# Altium PCB SX1308_GTW_e381v02c.PcbDoc (part 3 of 3)
Units mil, origin at the board's own origin, x right, y up, seen from the top; angles counter-clockwise.
Board outline 2874.02 x 1220.47 mil, 4 copper layers (Top Layer, MidLayer1 - GND, MidLayer2 - Power, Bottom Layer), stack 62.441 mil thick; 180 components, 130 nets, 612 pads, 859 vias.
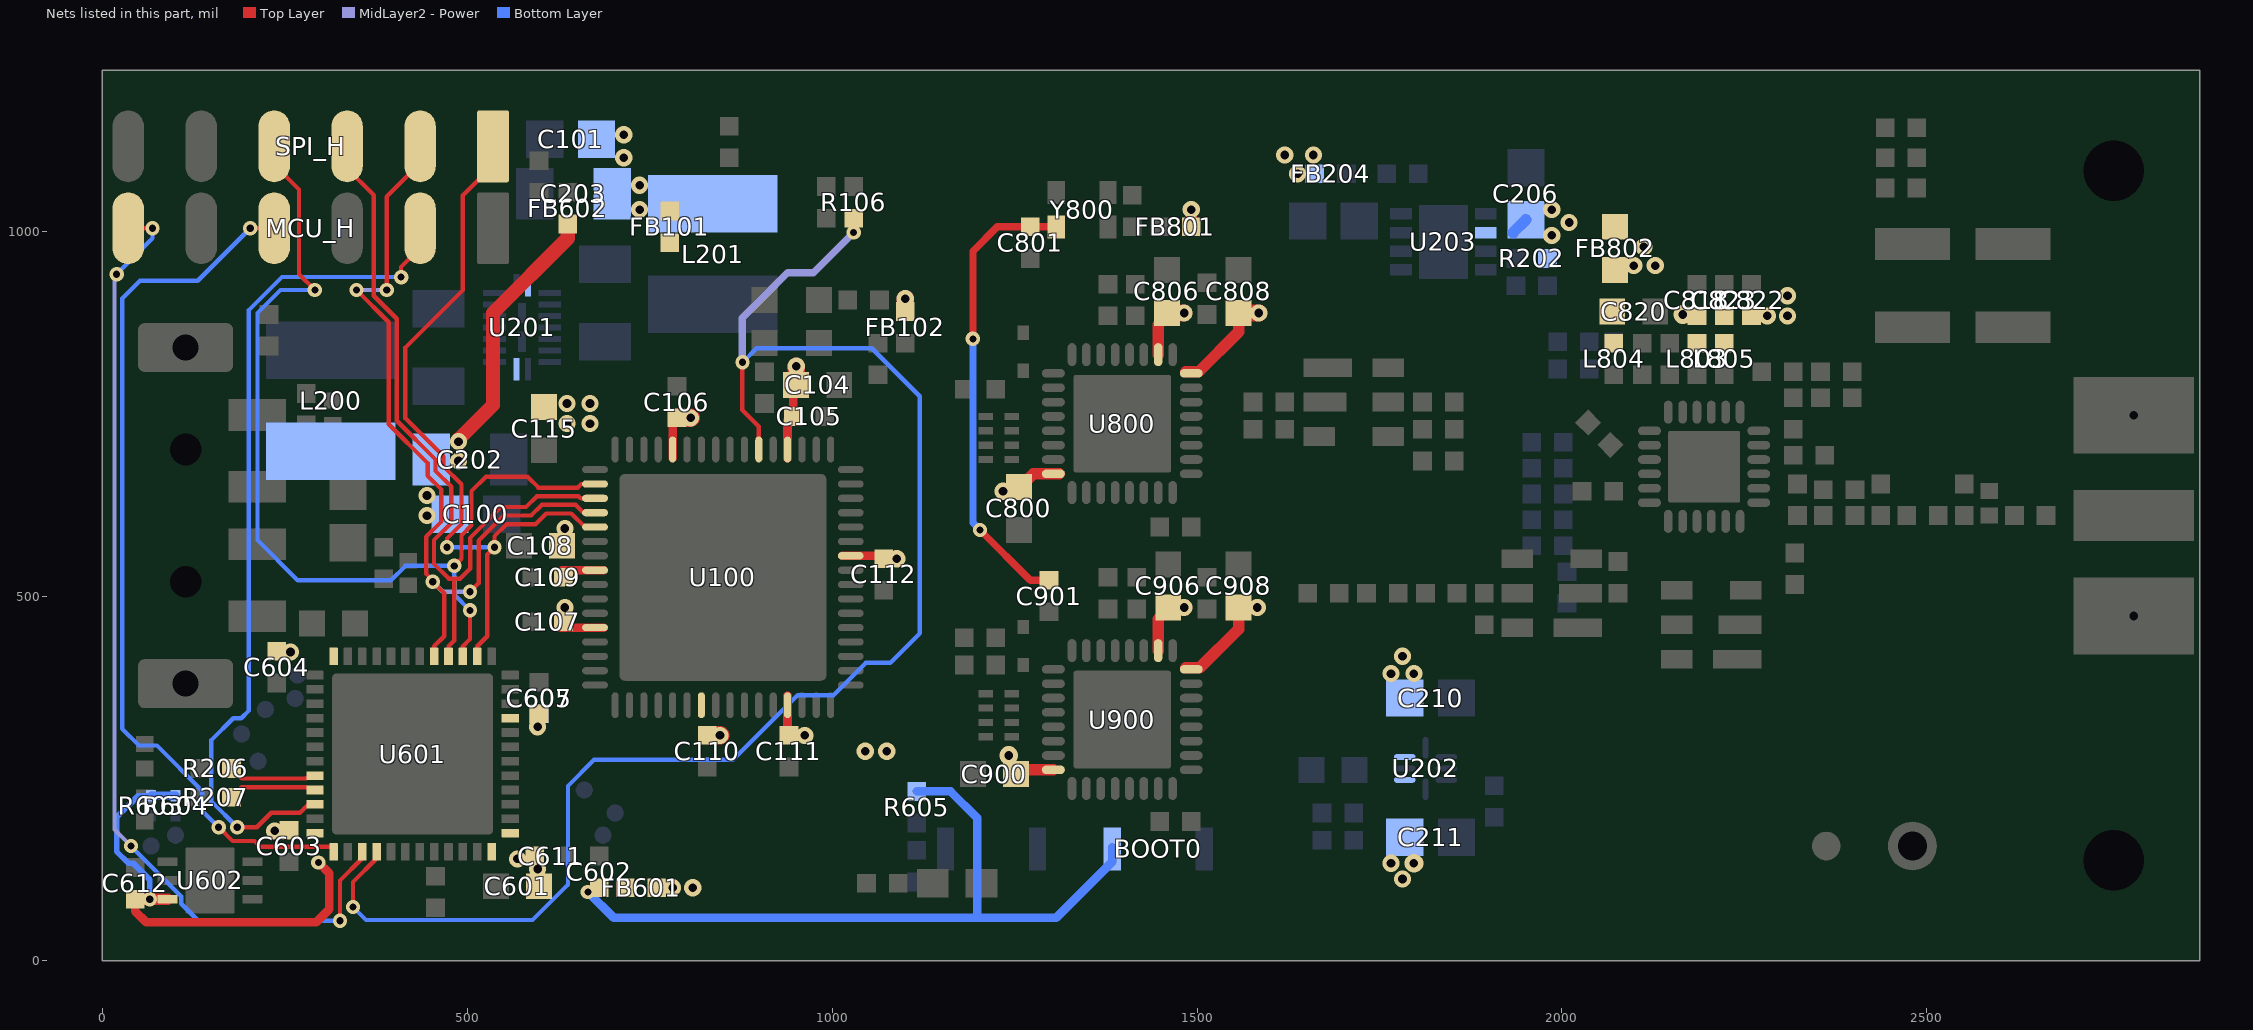
[diagram p5: the nets of this part, all layers, seen from the top]

## Via types
v1: diameter 23.62, hole 11.81, Top Layer to Bottom Layer, tented both sides, 584 vias
v2: diameter 19.68, hole 9.84, Top Layer to Bottom Layer, tented both sides, 166 vias
v3: diameter 23.62, hole 11.81, Top Layer to Bottom Layer, tented top, 89 vias
v4: diameter 19.68, hole 10, Top Layer to Bottom Layer, tented top, 16 vias
v5: diameter 25.59, hole 11.81, Top Layer to Bottom Layer, tented both sides, 3 vias
v6: diameter 18.9, hole 9.84, Top Layer to Bottom Layer, tented both sides, 1 vias

## Nets (pads, with @x,y where several pads share a name; then routed paths per layer and width w, separated by ;. In a path a pad name is that pad's centre, name@x,y a point inside that pad or via, vN(x,y) a via of type N, cw(c..) or ccw(c..) an arc to the next point about the centre after c; other vN are vias at no path point) (continued)
SPI_MISO: SPI_H.3 U100.3 U601.16 | length 1057.5
  Top Layer w5.91: SPI_H.3@334.65,1118.11 334.65,1086.61 371.97,1049.29 371.97,911.5 403.54,879.92 403.54,740.09 456.69,686.94 456.69,671.26 478.35,649.61 478.35,600.33 454.65,576.63 454.65,543.81 474.91,523.54 490.08,523.54 504.02,537.48 504.02,579.57 546.49,622.05 580.71,622.05 595.47,636.81 652.56,636.81 655.51,633.86 U100.3@674.21,633.86 ; U601.16@474.41,417.32 474.41,431.1 482.36,439.06 482.36,523.3 482.28,523.38 ; U100.3@672.24,635.83 U100.3@674.21,633.86 ; U100.3@675.2,633.86 U100.3@674.21,633.86
SPI_MOSI: SPI_H.2 U100.4 U601.17 | length 1147.9
  Top Layer w5.91: v2(348.43,919.29) 392.64,875.08 392.64,735.31 445.79,682.17 445.79,664.84 464.65,645.98 464.65,602.05 443.74,581.14 443.74,530.67 452.76,521.65 v2(452.76,519.68) 468.58,503.86 468.58,444.96 454.72,431.1 U601.17@454.72,417.32 ; v2(389.76,919.29) 389.76,1047.24 435.43,1092.91 SPI_H.2@435.43,1116.14 ; v2(503.94,505.91) 515.75,517.72 515.75,575.88 550.1,610.24 587.6,610.24 602.36,625 648.62,625 659.45,614.17 U100.4@675.2,614.17
  MidLayer2 - Power w5.91: v2(348.43,919.29) v2(389.76,919.29) ; v2(452.76,519.68) 466.54,505.91 v2(503.94,505.91)
SPI_NSS: SPI_H.1 U100.5 U601.14 | length 1010.3
  Top Layer w5.91: v2(472.44,566.93) 472.44,578.84 492.13,598.53 492.13,653.15 467.6,677.68 467.6,691.46 415.35,743.7 415.35,840.55 494.09,919.29 494.09,1049.21 SPI_H.1@531.5,1086.61 ; U601.14@513.78,417.32 513.78,431.1 527.48,444.8 527.48,557.01 v2(537.4,566.93) 537.4,582.11 553.71,598.43 593.5,598.43 608.27,613.19 642.72,613.19 661.42,594.49 673.62,594.49 674.41,595.28 U100.5@675.2,594.49 ; SPI_H.1@535.43,1116.14 SPI_H.1@535.43,1118.11
  MidLayer2 - Power w7.87: v2(537.4,566.93) v2@539.37,566.93
  Bottom Layer w5.91: v2(472.44,566.93) v2(537.4,566.93)
SPI_SCK: SPI_H.4 U100.2 U601.15 | length 1361.2
  Top Layer w5.91: SPI_H.4@236.22,1118.11 236.22,1090.55 269.69,1057.09 269.69,940.94 v2(291.34,919.29) ; v2(482.28,541.34) 492.13,551.18 492.13,583.11 505.91,596.89 505.91,643.7 525.67,663.46 582.6,663.46 597.52,648.54 651.5,648.54 656.5,653.54 657.48,653.54 U100.2@675.2,653.54 U100.2@675.98,654.33 ; U601.15@494.09,417.32 494.09,431.1 503.94,440.94 v2(503.94,480.31)
  Bottom Layer w5.91: v2(291.34,919.29) 244.09,919.29 212.6,887.8 212.6,576.77 267.72,521.65 395.67,521.65 415.35,541.34 v2(482.28,541.34) 482.36,541.26 482.36,501.89 v2(503.94,480.31)
SWCLK: MCU_H.4 U601.37 | length 1217
  Top Layer w5.91: v2(159.46,183.08) 159.89,183.07 178.59,164.37 208.66,164.37 216.46,156.57 316.85,156.57 316.93,156.5 U601.37@316.93,149.61 ; v2(202.76,1003.94) MCU_H.4@235.43,1003.94
  Bottom Layer w5.91: v2(159.46,183.08) 136.81,205.71 136.81,233.27 74.8,295.28 50.2,295.28 27.48,317.99 27.48,907.79 51.77,932.09 130.91,932.09 v2(202.76,1003.94)
SWDIO: MCU_H.2 U601.34 | length 1139.9
  Top Layer w5.91: v2(185.05,183.08) 211.62,183.08 231.61,203.07 270.91,203.07 282.4,214.57 U601.34@291.34,214.57 ; v2(409.45,937.01) 409.45,950.79 MCU_H.2@429.13,970.47 ; MCU_H.2@435.04,1003.94 MCU_H.2@435.43,1003.94
  Bottom Layer w5.91: v2(185.05,183.08) 149.53,218.58 149.53,302.65 179.48,332.6 190.44,332.6 200.87,343.02 200.87,891.81 246.14,937.09 409.37,937.09 v2(409.45,937.01)
TRACESWO: MCU_H.6 U601.39 | length 1352.9
  Top Layer w5.91: MCU_H.6@35.43,1003.94 v2(68.9,1003.94) ; v2(325.79,55.12) 325.73,55.18 325.73,110.1 356.3,140.67 U601.39@356.3,149.61
  MidLayer2 - Power w5.91: v2(19.68,940.94) 16.73,937.99 16.73,180.12 v2(39.37,157.49)
  Bottom Layer w5.91: v2(19.68,940.94) 68.9,990.16 v2(68.9,1003.94) ; v2(39.37,157.49) 39.37,157.09 108.19,88.27 108.19,78.43 131.5,55.12 v2(325.79,55.12)
TX_ON: R106.2 U100.54 U601.40 | length 2107.6
  Top Layer w5.91: v2(343.52,73.82) 343.52,108.21 375.98,140.67 U601.40@375.98,149.61 ; v2@876.97,819.88 876.97,754.92 899.61,732.28 U100.54@899.61,700.79
  MidLayer2 - Power w9.84: v2@876.97,819.88 876.97,880.91 938.98,942.91 974.41,942.91 v2(1029.53,998.03)
  Bottom Layer w5.91: v2(343.52,73.82) 361.3,56.02 589.49,56.02 638.03,104.57 638.03,239.8 673.82,275.59 864.17,275.59 952.76,364.17 1001.97,364.17 1046.18,408.39 1079.65,408.39 1120.08,448.82 1120.08,773.62 1054.21,839.49 896.57,839.49 v2@877.95,820.87
  other v2: 877.17,820.35
USB_DM: R206.2 U601.32 | length 121.5
  Top Layer w5.91: R206.2@177.17,263.78 190.94,250 279.53,250 283.46,253.94 U601.32@291.34,253.94
USB_DP: R207.2 U601.33 | length 121.5
  Top Layer w5.91: R207.2@177.17,224.41 190.94,238.19 279.53,238.19 283.46,234.25 U601.33@291.34,234.25
VCC33: BOOT0.2 C601.2 C602.2 C603.2 C604.2 C605.2 C607.2 C611.2 C612.2 FB601.2 R603.2 R604.2 R605.2 U601.1 U601.9 U601.24 U601.36 U601.48 U602.3 | length 1657.5
  Top Layer w11.81: C612.2@45.28,84.65 45.28,67.91 60.12,53.07 293.23,53.07 311.1,70.94 311.1,120 296.26,134.84 v2(296.18,134.84)
  Top Layer w15.75: C612.2@45.28,84.65 U602.3@89.57,84.65
  Bottom Layer w7.87: v2(64.96,84.65) 64.96,111.22 42.32,133.86 35.94,133.86 19.68,150.12 19.68,196.85 49.21,226.38 R603.2@66.93,226.38
  Bottom Layer w11.81: R603.2@66.93,226.38 R604.2@100.39,226.38 ; v2(665.35,94.49) 700.79,59.06 1198.82,59.06 ; R605.2@1116.14,232.28 1162.4,232.28 1198.9,195.79 1198.9,59.13 1198.82,59.06 ; BOOT0.2@1383.86,155.51 BOOT0.2@1383.86,153.54 1383.86,135.83 1307.09,59.06 1198.82,59.06
  other v1: 596.46,125.98 568.9,139.76 236.22,178.15 596.46,320.87 257.87,423.23
VCC_FEM: C820.2 C822.2 C823.2 FB802.2 L804.2 L805.2
  other v1: 2281.5,883.86 2309.06,883.86 2309.06,911.42 2098.43,952.76 2127.95,952.76 2112.2,978.35
VCC_FEM_1: C206.1 FB802.1 R202.1 U203.6 | length 25.1
  Bottom Layer w15.75: C206.1@1933.07,998.03 C206.1@1950.79,1015.75
  other v1: 1986.22,994.09 2009.84,1011.81 1986.22,1029.53
VCCA_A: C210.1 C800.2 C806.2 C808.2 C818.2 FB801.1 L803.2 U202.3 U800.2 U800.16 U800.32 | length 319.4
  Top Layer w15.75: C800.2@1255.91,653.54 1261.81,653.54 1275.59,667.32 U800.16@1303.15,667.32 U800.16@1311.02,667.32 ; U800.2@1446.85,830.71 1446.85,872.05 1458.66,883.86 C806.2@1458.66,887.8 ; U800.32@1484.25,807.09 1501.97,807.09 1557.09,862.2 C808.2@1557.09,887.8 ; FB801.1@1492.13,1005.91 v1(1492.13,1029.53)
  Top Layer w23.62: C806.2@1458.27,888.19 C806.2@1458.66,887.8 v1(1482.28,887.8) ; C808.2@1557.09,887.8 v1(1584.65,887.8)
  other v1: 1765.75,393.7 1797.24,393.7 1781.5,417.32 1234.25,643.7
  other v5: 2165.35,885.83
VCCA_B: C211.1 C900.2 C906.2 C908.2 U202.1 U900.2 U900.16 U900.32 | length 282.5
  Top Layer w15.75: C900.2@1257.87,261.81 U900.16@1303.15,261.81 ; U900.2@1446.85,425.2 1446.85,468.5 1460.63,482.28 C906.2@1460.63,484.25 ; U900.32@1484.25,401.57 1503.94,401.57 1557.09,454.72 C908.2@1557.09,484.25
  Top Layer w19.68: C908.2@1557.09,484.25 1580.71,484.25 v1@1582.68,486.22
  Top Layer w23.62: C906.2@1460.63,484.25 v1(1482.28,484.25)
  other v1: 1781.5,112.2 1765.75,133.86 1582.68,484.25
  other v5: 1797.24,133.86 1242.13,281.5
VCCDIG18: C106.2 C107.2 C108.2 C109.2 C110.2 C112.2 C115.1 FB101.2 U100.8 U100.12 U100.23 U100.42 U100.60 | length 280.7
  Top Layer w11.81: C107.2@625.98,456.69 U100.12@675.2,456.69 U100.12@687.01,456.69 ; C109.2@629.92,535.43 U100.8@675.2,535.43 U100.8@687.01,535.43 ; U100.60@781.5,688.98 U100.60@781.5,700.79 781.5,740.16 785.43,744.09 C106.2@787.4,744.09 ; C110.2@822.83,311.02 C110.2@822.83,314.96 ; U100.42@1013.78,555.12 U100.42@1025.59,555.12 C112.2@1064.96,555.12 ; C112.2@1068.9,555.12 C112.2@1064.96,555.12 ; C112.2@1070.87,549.21 C112.2@1064.96,555.12
  Top Layer w25.59: C106.2@787.4,744.09 v1(806.1,744.09) ; C110.2@828.74,309.06 v1(846.46,309.06)
  other v1: 633.86,484.25 1088.58,551.18 633.86,592.52 636.81,736.22 668.31,736.22 636.81,763.78 668.31,763.78
VCCDIG18_1: C101.2 C203.1 FB101.1 L201.2 U201.9
  other v1: 736.22,1029.53 736.22,1062.99 714.57,1100.39 714.57,1131.89
VCCDIG33: C100.2 C104.2 C105.2 C111.2 C202.1 FB102.1 FB204.1 FB601.1 FB602.2 L200.1 U100.29 U100.52 U201.18 | length 567.7
  Top Layer w11.81: C111.2@938.98,309.06 U100.29@938.98,350.39 U100.29@938.98,363.19 ; U100.52@938.98,688.98 U100.52@938.98,700.79 938.98,740.16 C105.2@946.85,748.03 ; C105.2@946.85,746.06 C105.2@946.85,748.03 ; C104.2@948.82,789.37 946.85,787.4 C104.2@946.85,785.43 ; C104.2@950.79,789.37 C104.2@946.85,785.43 ; C105.2@946.85,748.03 C104.2@946.85,785.43
  Top Layer w19.68: v1(488.19,711.61) 488.19,714.57 535.43,761.81 535.43,887.8 637.8,990.16 FB602.2@637.8,1009.84
  Top Layer w23.62: C104.2@950.79,791.34 v1(950.79,814.96) ; FB102.1@1100.39,889.76 v1(1100.39,907.48)
  other v1: 781.5,100.39 809.06,100.39 1045.28,287.4 1074.8,287.4 962.6,309.06 444.88,610.24 444.88,637.8 488.19,685.04 1637.8,1078.74 1620.08,1104.33 1659.45,1104.33
XTL_OUT: C801.1 C901.2 Y800.3 | length 637
  Top Layer w9.84: v2(1192.91,852.36) 1192.91,972.44 1226.38,1005.91 C801.1@1271.65,1005.91 Y800.3@1307.09,1005.91 ; v2(1202.76,590.55) 1271.65,521.65 C901.2@1297.24,521.65
  Bottom Layer w9.84: v2(1192.91,852.36) 1192.91,600.39 v2(1202.76,590.55)
pads on no net: "Fiducial Mark1.1" U100.13 U100.17 U100.18 U100.25 U100.26 U100.27 U100.28 U100.37 U100.38 U202.8 U203.1 U203.4 U203.5 U601.6 U601.11 U601.38 U602.5 U602.6 U800.6 U800.10 U800.21 U800.22 U800.23 U800.24 U802.19 U802.22 U900.6 U900.11 U900.21 U900.22 U900.23 U900.24 U900.29 U900.30 USB_DC_IN.NPTH1 USB_DC_IN.NPTH2

## Polygon pours and split planes (outlines as drawn)
GND on Bottom Layer "Bot GND" (solid, pour order 80): 2866.14,7.87 1606.3,7.87 1606.3,94.49 1891.73,94.49 1931.1,133.86 1931.1,419.29 1830.71,419.29 1830.71,437.01 1742.13,437.01 1742.13,307.09 1606.3,307.09 1606.3,7.87 11.81,7.87 11.81,228.35 217.52,228.35 217.52,86.61 628.94,86.61 628.94,287.4 887.8,287.4 1072.83,472.44 1161.42,472.44 1161.42,570.87 1251.97,480.32 1318.9,480.32 1326.77,488.19 1326.77,582.68 1281.5,582.68 1228.35,635.83 1228.35,872.05 931.1,872.05 931.1,1212.6 2866.14,1212.6
VCC33 on Bottom Layer "Bott Layer VCC33" (solid, pour order 61): 611.22,153.54 611.22,333.19 607.8,336.61 545.28,336.61 531.5,322.83 531.5,153.54
GND on Bottom Layer "Bot GND" (solid, pour order 77): 11.81,1212.6 547.24,1212.6 547.24,956.69 11.81,956.69 11.81,1129.64
GND on Bottom Layer "Bot GND" (solid, pour order 78): 937.01,1212.6 937.01,1084.65 870.08,1084.65 856.3,1098.43 856.3,1157.48 852.36,1161.42 102.36,1161.42 102.36,1212.6
GND on Bottom Layer "GND FEM" (solid, remove dead copper, pour order 76): 1596.46,1122.05 2037.4,1122.05 2037.4,887.8 1596.46,887.8
VCCDIG18 on Bottom Layer "VCC18" (solid, remove dead copper, pour order 74): 702.76,295.28 702.76,673.23 999.02,673.23 999.02,573.82 1037.4,535.43 1098.43,535.43 1100.39,537.4 1100.39,574.8 1088.58,586.61 1088.58,724.41 1035.43,777.56 627.95,777.56 617.13,766.73 617.13,687.99 622.05,683.07 622.05,336.61 663.39,295.28
VCCDIG18 on Bottom Layer "VCCDIG18 Bot" (solid, remove dead copper, pour order 75): 651.57,432.09 705.71,377.95 804.13,377.95 862.2,319.88 862.2,301.18 856.3,295.28 663.39,295.28 651.57,307.09
NetFB203_2 on Bottom Layer "Bott Layer FB302" (solid, pour order 59): 92.52,872.05 92.52,773.62 38.39,719.49 38.39,348.43 185.04,348.43 185.04,724.41 133.86,775.59 133.86,872.05
GND on Bottom Layer "32M GND Bot" (solid, remove dead copper, pour order 58): 1162.99,879.92 1162.99,577.17 1253.94,486.22 1314.96,486.22 1320.87,492.13 1320.87,568.9 1314.96,574.8 1279.53,574.8 1222.83,631.5 1222.83,879.92
VCCDIG33 on Bottom Layer "Midlayer GND" (solid, pour order 57): 767.72,92.52 775.59,84.65 954.72,84.65 1088.58,218.5 1088.58,293.31 1078.74,303.15 1043.31,303.15 1007.87,267.72 1007.87,253.94 907.48,153.54 789.37,153.54 767.72,131.89
VCC33 on Bottom Layer "Bott Layer VCC33" (solid, pour order 60): 557.09,112.2 557.09,120.08 551.18,125.98 263.78,125.98 224.41,165.35 224.41,424.21 245.08,444.88 300.2,444.88 319.88,425.2 319.88,181.1 321.85,179.13 592.52,179.13 608.27,163.39 608.27,118.11 602.36,112.2
GND on Top Layer "Top Layer GND" (solid, remove dead copper, pour order 79): 11.81,1212.6 11.81,7.87 2866.14,7.87 2866.14,1212.6
VCCDIG18 on Top Layer "TOP-Layer VCCDID18" (solid, pour order 56): 698.82,819.88 824.8,945.87 824.8,1001.97 693.9,1001.97 693.9,991.14 561.02,858.27 561.02,763.78 602.36,722.44 679.13,722.44 698.82,742.13
GND on MidLayer2 - Power "Midlayer GND" (solid, pour order 82): 2866.14,9.84 2866.14,1210.63 11.81,1210.63 11.81,9.84
+5V on MidLayer2 - Power "Midlayer +5V" (solid, pour order 62): 356.3,519.69 413.39,576.77 413.39,661.42 263.78,661.42 220.47,704.72 220.47,889.76 277.56,946.85 492.13,946.85 505.91,933.07 704.72,933.07 704.72,964.57 719.49,979.33 719.49,1077.76 87.6,1077.76 11.81,1001.97 11.81,519.69
+5V on MidLayer2 - Power "Midlayer +5V" (solid, pour order 64): 413.39,582.68 413.39,679.13 476.38,742.13 513.78,742.13 555.12,783.46 590.55,783.46 608.27,801.18 608.27,812.99 593.5,827.76 437.99,827.76 348.43,738.19 263.78,738.19 157.48,844.49 157.48,582.68
VCCA_B on MidLayer2 - Power "Mid-Layer 2 VCCA_B" (solid, pour order 70): 1748.03,283.46 1698.82,332.68 1602.36,332.68 1557.09,377.95 1557.09,500 1633.86,500 1812.99,320.87 1812.99,98.43 1748.03,98.43
VCC_FEM on MidLayer2 - Power "Mid-Layer 2 FEM" (solid, pour order 71): 2084.65,938.98 2149.61,938.98 2179.13,968.5 2266.73,968.5 2279.53,955.71 2279.53,907.48 2267.72,895.67 2267.72,870.08 2269.69,868.11 2329.72,868.11 2350.39,888.78 2350.39,1011.81 2324.8,1037.4 2151.57,1037.4 2084.65,970.47
VCCA_A on MidLayer2 - Power "Mid-Layer 2 VCCA_A" (solid, pour order 67): 2185.04,858.27 2171.26,844.49 1606.3,844.49 1606.3,935.04 2171.26,935.04 2185.04,921.26
VCCA_A on MidLayer2 - Power "Mid-Layer 2 VCCA_A" (solid, pour order 68): 1377.95,643.7 1413.39,679.13 1413.39,972.44 1484.25,1043.31 1554.13,1043.31 1668.31,929.13 1668.31,878.94 1633.86,844.49 1540.35,844.49 1527.56,831.69 1527.56,706.69 1590.55,643.7
VCCA_A on MidLayer2 - Power "Mid-Layer 2 VCCA_A" (solid, pour order 66): 1812.99,379.92 1812.99,553.18 1686.91,677.17 1242.13,677.17 1220.47,655.51 1220.47,637.8 1244.09,614.17 1425.2,614.17 1450.79,588.58 1450.79,515.75 1669.29,515.75 1750,435.04 1750,391.73 1761.81,379.92
VCCA_B on MidLayer2 - Power "Mid-Layer 2 VCCA_B" (solid, pour order 69): 1226.38,251.97 1226.38,364.17 1362.2,500 1596.46,500 1596.46,377.95 1557.09,377.95 1529.53,405.51 1401.57,405.51 1320.87,324.8 1320.87,251.97
VCCDIG33 on MidLayer2 - Power "Mid-Layer VCCDID33" (solid, pour order 72): 482.28,726.38 555.12,726.38 673.23,844.49 942.91,844.49 1047.24,740.16 1047.24,712.6 1007.87,673.23 722.44,673.23 639.76,590.55 440.94,590.55 431.1,600.39 431.1,675.2
VCCDIG33 on MidLayer2 - Power "Mid-Layer VCCDID33" (solid, pour order 73): 935.04,374.02 935.04,285.43 944.88,275.59 1080.71,275.59 1086.61,281.5 1086.61,698.82 1124.02,736.22 1124.02,909.45 1114.17,919.29 1084.65,919.29 1031.5,866.14 954.72,866.14 931.1,842.52 931.1,769.68 999.02,701.77 999.02,378.94 994.09,374.02
VCCDIG33 on MidLayer2 - Power "Midlayer VCCDIG33" (solid, pour order 29): 1681.1,1118.11 1681.1,1049.21 1474.41,1049.21 1295.28,870.08 1153.54,870.08 1124.02,840.55 1124.02,826.77 893.7,826.77 893.7,840.55 1149.61,1096.46 1594.49,1096.46 1600.39,1102.36 1600.39,1118.11
+5V on MidLayer2 - Power "+5V" (solid, pour order 63): 1846.46,1064.96 1846.46,1145.67 1812.99,1179.13 814.96,1179.13 677.17,1041.34 677.17,935.04 679.13,933.07 783.46,933.07 952.76,1102.36 1049.21,1102.36 1072.83,1125.98 1742.13,1125.98 1803.15,1064.96
+5V on MidLayer2 - Power "Midlayer +5V" (solid, pour order 65): 1681.1,301.18 1722.44,301.18 1744.09,279.53 1744.09,125.98 1661.42,43.31 39.37,43.31 11.81,70.87 11.81,559.06 233.27,559.06 233.27,217.52 285.43,165.35 1629.92,165.35 1683.07,218.5 1671.26,206.69 1681.1,216.54
GND on MidLayer1 - GND "Mid-Layer 1 GND" (solid, remove dead copper, pour order 81): 9.84,9.84 9.84,1210.63 2866.14,1210.63 2866.14,9.84
+5V on MidLayer1 - GND "Midlayer1 +5V" (solid, pour order 32): 21.65,913.39 21.65,767.72 220.47,767.72 220.47,913.39

## Keep-outs
Keep-Out Layer:
  lines w1.97: 1.97,1.97 1.97,1218.5 2874.02,1218.5 2874.02,1.97 1.97,1.97

## Other copper
Top Layer:
  region net GND: 1315.04,478.27 1342.52,450.79 1346.46,450.79 1346.46,555.12 1315.04,555.12
  region net GND: 1279.45,511.69 1279.45,472.44 1238.19,472.44 1238.19,507.87 1242.01,511.69
  region net GND: 229.33,94.49 229.33,63.98 178.15,63.98 175.2,66.93 175.2,94.49
  region net GND: 2251.97,633.86 2281.5,633.86 2303.15,612.2 2303.15,595.47 2311.02,587.6 2347.44,587.6 2347.44,566.93 2336.61,577.76 2306.1,577.76 2261.81,622.05 2251.97,622.05
  region net GND: 58.07,140.75 15.75,140.75 15.75,103.35 58.07,103.35
  region net NetL808_1: 2270.67,794.29 2258.86,794.29 2252.95,800.2 2270.67,817.91
  region net GND: 2341.54,581.69 2341.54,587.6 2347.44,587.6
  pour cut-out: 2568.9,587.6 2602.36,587.6 2602.36,590.55 2568.9,590.55
  region net GND: 2681.1,632.87 2424.21,632.87 2424.21,681.1 2437.01,681.1 2437.01,654.53 2681.1,654.53
  region net GND: 2330.71,670.28 2346.46,686.02 2346.46,671.26 2330.71,655.51
  region net NetC829_2: 2687.01,606.3 2700.79,592.52 2700.79,627.95 2687.01,614.17
  pour cut-out: 58.07,99.41 58.07,113.19 67.91,113.19 67.91,100.39 68.9,99.41
  region net GND: 291.34,799.21 291.34,771.65 301.18,771.65 301.18,799.21
  region net GND: 468.15,98.35 470.12,96.38 470.12,82.83 481.3,71.65 481.3,60.04 464.57,60.04 464.57,98.35
  pour cut-out: 688.98,129.92 817.91,129.92 827.76,120.08 827.76,81.69 824.8,81.69 823.82,82.68 823.82,119.09 816.93,125.98 815.94,125 691.93,125
  region net GND: 623.03,129.92 623.03,188.98 671.26,188.98 671.26,129.92
  region net GND: 431.1,537.4 431.1,580.71 407.48,580.71 407.48,537.4
  region net GND: 210.63,393.7 210.63,375.98 218.5,368.11 251.97,368.11 251.97,393.7
  region net VCC33: 225.39,407.48 225.39,438.98 322.83,438.98 322.83,407.48
  region net VCC33: 559.06,181.1 559.06,169.29 594.49,169.29 594.49,181.1
  region net VCC33: 582.68,188.98 616.14,188.98 616.14,149.61 582.68,149.61
  pour cut-out: 542.32,750 571.85,750 558.07,763.78 558.07,858.27 671.26,971.46 671.26,993.11 674.21,996.06 650.59,996.06 650.59,983.27 547.24,879.92 547.24,754.92
  region net GND: 2417.32,862.2 2454.72,862.2 2454.72,832.68 2452.76,834.65 2417.32,834.65
  region net GND: 562.13,1120.08 562.13,1068.03 580.71,1068.03 580.71,1120.08
  region net GND: 585.87,731.81 600.12,717.56 622.99,717.56 622.99,682.05 622.91,681.97 608.11,681.97 605.16,679.02 605.16,656.85 605,656.69 600.63,656.69 577.68,679.65 577.68,731.81
  region net VCCDIG18_1: 699.8,1009.84 699.8,1145.67 748.03,1145.67 824.8,1068.9 824.8,1009.84
  region net GND: 842.64,1125.91 842.64,1074.8 850.39,1074.8 850.39,1125.91
  region net GND: 1968.5,478.35 1988.19,478.35 1988.19,531.5 1968.5,531.5
  region net GND: 2187.01,490.16 2187.01,433.07 2206.69,433.07 2206.69,490.16
  region net GND: 1712.6,791.34 1712.6,742.13 1732.28,742.13 1732.28,791.34
  pour cut-out: 1642.48,788.39 1646.3,788.39 1646.3,788.03 1645.91,787.64 1642.32,787.64
  region net GND: 2269.69,633.86 2253.94,633.86 2242.13,645.67 2234.25,645.67 2234.25,627.95 2243.11,627.95 2249.02,622.05 2269.69,622.05
  region net GND: 2681.1,632.83 2681.06,632.87 2648.62,632.87 2648.62,671.22 2653.39,671.22 2653.39,636.34 2681.1,636.34
  pour cut-out: 2169.29,905.51 2149.61,905.51 2149.61,901.57 2165.35,901.57
  region net GND: 1665.87,479.06 1667.4,481.93 1667.4,527.48 1667.28,527.6 1664.69,527.6 1664.69,479.06
  region net GND: 1451.97,679.13 1505.63,679.13 1522.48,662.28 1530.87,662.28 1530.87,666.73 1504.69,692.91 1451.97,692.91
  region net GND: 2147.44,483.27 2135.83,494.88 2135.83,514.53 2199.21,577.91 2209.29,577.91 2273.62,513.58 2273.62,494.84 2262.05,483.27
  region net GND: 2099.41,467.44 2099.41,549.13 2108.27,549.13 2108.27,467.44
  region net GND: 2058.98,526.61 2058.98,572.48 2051.18,572.48 2051.18,526.61
  region net GND: 1015.75,364.17 1015.75,407.36 1055.12,407.36 1055.12,364.17
  region net GND: 204.45,863.31 249.57,863.31 249.57,874.02 204.52,874.02
  pour cut-out: 267.72,393.7 267.72,343.5 271.65,343.5 273.62,345.47 273.62,393.7
  region net GND: 76.02,206.61 39.17,206.61 39.17,200.24 75.98,200.24 76.02,200.28
  region net GND: 46.34,328.74 46.34,286.42 51.18,281.57 125.98,281.57 125.98,303.15 70.87,303.15 70.87,328.74
  region net NetFB203_2: 242.13,858.27 242.13,822.83 114.17,822.83 114.17,858.27
  region net GND: 215.55,872.05 263.78,872.05 263.78,899.61 255.91,907.48 215.55,907.48
  region net GND: 1358.27,1031.5 1433.07,1031.5 1433.07,1040.35 1358.27,1040.35
  pour cut-out: 255.91,676.18 255.91,594.49 458.66,594.49 458.66,676.18
  region net GND: 434.06,90.55 434.06,81.69 444.88,70.87 444.88,62.01 468.5,62.01 468.5,85.63 457.68,85.63 447.83,95.47 438.98,95.47
  pour cut-out: 1226.06,233.78 1226.06,236.54 1226.1,236.57 1226.34,236.57 1226.34,233.74
  pour cut-out: 1208.66,340.55 1248.03,340.55 1248.03,332.68 1208.66,332.68
  region net VCC33: 303.15,181.1 279.53,181.1 268.7,191.93 233.27,191.93 224.41,183.07 224.41,172.24 231.3,165.35 275.59,165.35 279.53,169.29 303.15,169.29
  region net VCC33: 547.24,338.58 572.83,338.58 585.63,351.38 611.22,351.38 611.22,315.94 604.33,309.06 590.55,309.06 572.83,326.77 547.24,326.77
  region net VCC33: 529.53,159.45 547.24,159.45 549.21,161.42 549.21,179.13 568.9,179.13 568.9,139.76 529.53,139.76
  region net GND: 538.39,512.8 538.39,542.32 553.15,557.09 553.15,586.61 588.58,586.61 588.58,556.1 601.38,543.31 601.38,512.8
  region net +5V: 261.81,602.36 261.81,545.28 399.61,545.28 399.61,602.36
  region net VCCDIG18: 612.2,512.8 612.2,588.58 627.95,604.33 638.78,604.33 647.64,595.47 647.64,548.23 655.51,540.35 655.51,530.51 647.64,522.64 647.64,515.75 644.69,512.8
  region net GND: 352.24,755.04 257.87,755.04 257.87,779.53 352.24,779.53
  region net NetD204_1: 173.23,750 350.39,750 350.39,706.69 173.23,706.69
  region net NetD201_1: 173.23,539.37 397.64,539.37 411.42,525.59 431.1,525.59 431.1,496.06 273.62,496.06 248.03,470.47 173.23,470.47
  region net GND: 1875.98,705.79 1769.69,705.79 1769.69,692.91 1875.98,692.91
  region net GND: 1787.4,1055.12 1885.83,1055.12 1885.83,919.29 1787.4,919.29
  region net GND: 2097.24,833.46 2097.24,866.93 2110.24,879.92 2143.7,879.92 2160.63,862.99 2160.63,833.46
  region net GND: 2156.69,905.51 2141.73,890.55 2121.26,890.55 2121.26,925.2 2155.51,925.2 2155.51,937.01 2282.24,937.01 2282.24,905.51
  region net GND: 2118.9,926.77 2097.24,905.12 2097.24,865.35 2147.24,865.35 2147.24,913.78 2134.25,926.77
  region net VCC_FEM: 2208.66,833.66 2208.66,899.61 2283.46,899.61 2291.34,907.48 2291.34,921.26 2295.28,925.2 2322.83,925.2 2322.83,870.08 2236.22,870.08 2236.22,833.66
  region net VCC_FEM: 2051.18,833.46 2090.55,833.46 2090.55,905.51 2118.11,933.07 2141.73,933.07 2141.73,972.44 2124.02,990.16 2106.3,990.16 2084.65,968.5 2051.18,968.5
  region net VCC_FEM_1: 1972.44,1043.31 2074.8,1043.31 2092.52,1025.59 2092.52,986.22 2082.68,976.38 1972.44,976.38
  region net VCCDIG18: 619.09,450.79 619.09,496.06 639.76,496.06 651.57,484.25 651.57,472.44 664.37,459.65 664.37,450.79
  region net VCCDIG18: 1095.47,563.98 1101.38,558.07 1101.38,544.29 1095.47,538.39 1057.09,538.39 1044.29,551.18 1044.29,558.07 1050.2,563.98
  region net VCCA_A: 1273.62,631.89 1228.35,631.89 1222.44,637.8 1222.44,651.57 1246.06,675.2 1295.28,675.2 1273.62,653.54
  region net GND: 1222.44,622.05 1222.44,588.58 1238.19,572.83 1273.62,572.83 1273.62,622.05
  region net NetL800_2: 1707.48,516.54 1683.86,520.87 1683.86,487.4 1707.48,491.34
  region net GND: 1340.55,966.54 1340.55,824.8 1356.3,824.8 1356.3,907.48 1362.2,913.39 1604.33,913.39 1604.33,956.69 1425.2,956.69 1415.35,966.54
  region net GND: 954.72,923.23 889.76,923.23 889.76,874.02 954.72,874.02
  pour cut-out: 2874.02,525.2 2681.1,525.2 2681.1,695.28 2874.02,695.28
  region net GND: 977.36,733.27 977.36,816.93 1076.77,816.93 1076.77,785.43 1024.61,733.27
  region net GND: 1655.51,535.83 1665.75,525.59 1665.75,482.68 1652.76,469.69 1637.01,469.69 1637.01,536.61 1642.13,541.73
  region net GND: 1468.5,614.17 1411.42,614.17 1411.42,574.8 1297.24,574.8 1297.24,551.18 1334.65,551.18 1334.65,503.94 1352.36,503.94 1360.24,511.81 1586.61,511.81 1588.58,509.84 1600.39,521.65 1600.39,566.93 1468.5,566.93
  region net GND: 1399.61,984.25 1399.61,962.6 1594.49,962.6 1594.49,984.25
  region net GND: 1223.35,297.13 1223.35,236.22 1155.51,236.22 1155.51,271.65 1179.13,271.65 1179.13,297.13
  region net VCCA_B: 1273.62,236.22 1273.62,269.69 1249.02,294.29 1228.35,294.29 1228.35,236.22
  region net VCCDIG33: 933.07,733.27 933.07,783.46 968.5,783.46 968.5,733.27
  region net GND: 1340.55,826.77 1340.55,854.33 1334.65,860.24 1350.39,860.24 1350.39,826.77
  region net NetC824_2: 2104.33,627.95 2120.08,612.2 2135.83,627.95
  region net NetC821_2: 2151.57,763.78 2123.03,792.32 2123.03,815.94 2058.07,815.94 2058.07,790.35 2095.08,790.35 2141.34,744.09 2151.57,744.09
  region net NetC819_2: 2159.45,748.23 2159.45,765.75 2134.84,790.35 2134.84,815.94 2197.83,815.94 2197.83,790.35 2189.96,790.35 2171.26,771.65 2171.26,748.23
  region net NetL805_1: 2198.82,746.06 2198.82,783.46 2209.65,794.29 2209.65,815.94 2235.24,815.94 2235.24,790.75 2210.63,766.14 2210.63,746.06
  region net VCCA_A: 2197.83,833.66 2197.83,900 2161.42,900 2155.51,894.09 2155.51,877.56 2172.24,860.83 2172.24,833.66
  region net GND: 2014.76,656.5 2040.75,656.5 2045.28,651.97 2045.28,618.11 2039.37,612.2 2027.56,612.2 2014.76,625
  region net GND: 2347.24,701.97 2405.51,701.97 2405.51,675.98 2347.24,675.98
  region net GND: 2642.72,587.6 2681.1,587.6 2681.1,546.46 2671.46,546.46 2671.46,573.82 2670.28,575 2642.72,575
  region net GND: 2435.04,587.6 2681.1,587.6 2681.1,574.8 2435.04,574.8
  region net GND: 2339.57,673.23 2339.57,747.05 2348.43,747.05 2348.43,668.31 2335.63,668.31 2335.63,632.87 2315.94,632.87 2287.2,661.61 2230.31,661.61 2230.31,673.23
  region net GND: 2338.58,749.02 2338.58,668.31 2463.58,668.31 2463.58,681.69 2357.09,681.69 2357.09,749.02
  region net GND: 2376.97,746.85 2376.97,833.07 2405.51,833.07 2405.51,746.83
  pour cut-out: 2253.52,829.72 2238.37,829.72 2238.37,821.46 2253.52,821.46
  pour cut-out: 2048.23,823.23 2048.23,828.15 2046.26,830.12 2046.26,834.06 2048.43,834.06 2050.39,832.09 2050.39,823.23
  region net GND: 2050.59,669.29 2050.59,617.52 2035.24,617.52 2035.24,669.29
  region net GND: 2302.17,491.14 2302.17,536.42 2343.7,536.42 2343.7,524.21 2343.5,524.02 2318.7,524.02 2318.7,491.34 2318.5,491.14
  pour cut-out: 1198.82,767.72 1198.82,753.94 1192.91,753.94 1192.91,767.72
  region net GND: 1245.92,561.48 1225.98,581.42 1225.98,583.07 1247.83,583.07 1254.57,576.34 1254.57,572.29
  region net GND: 1169.09,236.22 1214.57,236.22 1214.57,247.64 1169.09,247.64
  region net GND: 260.83,669.29 260.83,608.27 399.61,608.27 399.61,669.29
  region net VCCDIG33: 744.09,124.02 816.65,124.02 822.83,117.83 822.83,84.65 744.09,84.65
  region net VCC33: 736.22,124.02 736.22,84.65 580.71,84.65 580.71,124.02
  region net GND: 623.03,157.48 623.03,129.92 714.57,129.92 714.57,157.48
  region net GND: 507.87,125 507.87,98.43 521.65,84.65 557.09,84.65 557.09,125
  region net VCC33: 549.21,141.73 568.9,122.05 568.9,84.65 624.02,84.65 624.02,118.11 616.14,125.98 616.14,161.42 574.8,161.42 562.99,173.23 549.21,173.23
  region net VCCDIG33: 928.15,323.82 976.38,323.82 976.38,294.29 928.15,294.29
  region net VCCDIG18: 816.93,366.14 814.96,364.17 814.96,319.88 819.88,314.96 837.6,314.96 837.6,320.87 826.77,331.69 826.77,364.17 824.8,366.14
  region net NetC608_2: 364.17,405.51 364.17,480.32 328.74,480.32 328.74,450.79 350.39,429.13 350.39,405.51
  region net GND: 269.69,480.32 322.83,480.32 322.83,444.88 269.69,444.88
  region net VCCDIG33: 476.38,714.57 476.38,685.04 500,685.04 500,714.57
  region net GND: 1524.8,335.04 1504.72,314.96 1450.79,314.96 1450.79,328.74 1505.91,328.74 1517.91,340.75 1522.24,340.75
  region net GND: 1460.63,388.61 1460.63,371.18 1504.32,371.18 1506.89,370.08 1508.46,369.09 1514.96,364.17 1519.69,364.17 1519.69,388.71
  region net GND: 1450.39,287.4 1450.39,273.62 1533.66,273.62 1533.66,287.4
  pour cut-out: 692.91,682.82 692.91,368.11 1007.87,368.11 1007.87,684.74
  pour cut-out: 1118.11,944.88 1118.11,818.9 1005.91,706.69 797.24,706.69 797.24,864.17 877.95,944.88
  pour cut-out: 1356.3,825.79 1356.3,909.45 1362.2,915.35 1574.8,915.35 1579.72,910.43 1579.72,907.48 1434.06,907.48 1429.13,902.56 1394.69,902.56 1394.69,844.49 1375.98,825.79
  pour cut-out: 1355.31,511.81 1579.72,511.81 1579.72,499.02 1374.02,499.02 1374.02,438.98 1355.31,438.98
  pour cut-out: 1408.46,614.17 1470.47,614.17 1470.47,624.02 1408.46,624.02
  region net GND: 1455.71,732.4 1549.37,732.4 1554.13,727.64 1554.13,712.6 1569.88,696.85 1556.3,683.27 1556.1,683.27 1519.06,720.32 1455.71,720.32
  region net GND: 1462.6,793.31 1462.6,779.45 1554.13,779.45 1554.13,803.54 1535.43,822.24 1506.5,793.31
  pour cut-out: 812.8,289.37 1007.87,289.37 1007.87,336.61 812.8,336.61
  region net GND: 815.94,289.37 815.94,252.95 832.68,236.22 854.33,236.22 854.33,263.78 838.58,263.78 838.58,289.37
  pour cut-out: 579.72,498.03 290.35,498.03 261.81,469.49 236.22,469.49 235.24,468.5 235.24,399.61 273.62,399.61 273.62,148.62 582.68,148.62 582.68,495.08
  region net GND: 2257.87,829.72 2241.22,829.72 2241.22,842.52 2257.87,842.52
  region net GND: 1599.41,743.11 1647.64,743.11 1647.64,696.85 1599.41,696.85
  pour cut-out: 1641.73,743.11 1647.64,743.11 1647.64,744.09 1640.75,744.09
  region net GND: 1772.64,743.11 1786.41,743.11 1786.41,699.69 1779.51,699.69 1779.51,737.2 1772.64,737.2
  pour cut-out: 1770.67,743.11 1793.31,743.11 1793.31,745.08 1771.65,745.08 1770.67,744.09
  pour cut-out: 1778.54,788.39 1790.35,788.39 1790.35,787.4 1778.54,787.4
  region net GND: 1871.06,481.3 1920.28,481.3 1920.28,437.01 1905.51,437.01 1905.51,472.44 1871.06,472.44
  pour cut-out: 1915.35,526.57 1919.29,526.57 1919.29,525.59 1914.37,525.59
  pour cut-out: 1915.35,481.3 1922.24,481.3 1922.24,482.28 1914.37,482.28
  region net GND: 2148.62,568.9 2172.24,592.52 2172.24,602.36 2132.22,602.36 2129.92,595.47 2129.92,584.65
  region net GND: 2008.78,971.34 2046.14,971.34 2046.14,966.38 2008.78,966.38
  region net GND: 1190.94,137.8 1169.29,137.8 1169.29,84.65 1242.13,84.65 1242.13,125.98 1190.94,125.98
  pour cut-out: 387.8,907.48 454.72,840.55 527.56,840.55 527.56,816.93 466.54,755.91 387.8,755.91
  region net GND: 243.11,148.62 273.62,148.62 278.54,143.7 278.54,123.03 243.11,123.03
  region net GND: 114.17,148.62 114.17,166.34 165.35,166.34 178.15,153.54 178.15,148.62
  region net GND: 2259.84,584.65 2315.94,528.54 2335.63,528.54 2335.63,512.8 2309.06,512.8 2309.06,521.65 2252.95,577.76
MidLayer1 - GND:
  pour cut-out: 2874.02,525.2 2681.1,525.2 2681.1,695.28 2874.02,695.28
  region net GND: 2143.7,728.35 2143.7,625.98 2244.09,625.98 2244.09,728.35
  region net GND: 1803.15,1037.4 1872.05,1037.4 1872.05,933.07 1803.15,933.07
  region net GND: 706.69,667.32 706.69,383.86 992.13,383.86 992.13,667.32
  region net GND: 2287.4,805.12 2287.4,734.25 2362.2,734.25 2362.2,805.12
MidLayer2 - Power:
  pour cut-out: 2874.02,525.2 2681.1,525.2 2681.1,695.28 2874.02,695.28
  region net GND: 2141.73,732.28 2141.73,622.05 2248.03,622.05 2248.03,732.28
  region net GND: 708.66,383.86 708.66,667.32 992.13,667.32 992.13,383.86
Bottom Layer:
  region net GND: 1967.52,554.13 1979.33,554.13 1979.33,544.29 1967.52,544.29
  region net GND: 1937.01,589.57 1937.8,589.57 1945.67,581.69 1949.61,581.69 1949.61,574.8 1937.01,574.8
  region net GND: 1971.65,818.5 1977.17,824.02 2015.75,824.02 2015.75,798.03 1971.65,798.03
  region net VCCDIG33: 1669.29,1060.04 1675.2,1065.94 1675.2,1121.06 1604.33,1121.06 1604.33,1060.04
  pour cut-out: 1596.46,1141.73 1596.46,879.92 2045.28,879.92 2045.28,1141.73 2037.4,1141.73 2037.4,887.8 1604.33,887.8 1604.33,1141.73
  pour cut-out: 1921.26,177.17 1931.1,177.17 1931.1,214.57 1921.26,214.57
  region net GND: 1330.71,803.15 1330.71,669.29 1464.57,669.29 1464.57,803.15
  region net GND: 1330.71,397.64 1330.71,263.78 1464.57,263.78 1464.57,397.64
  region net VCC_FEM_1: 1879.92,988.19 1970.47,988.19 1970.47,1023.62 1929.13,1023.62 1913.39,1007.87 1879.92,1007.87
  region net +5V: 1700.79,228.35 1700.79,151.57 1728.35,151.57 1728.35,228.35
  region net GND: 586.61,862.4 562.99,862.4 562.99,834.45 586.61,834.45
  region net GND: 586.61,901.77 586.61,873.82 562.99,873.82 562.99,901.77
  pour cut-out: 1964.57,938.98 1952.76,938.98 1952.76,942.91 1964.57,942.91
  region net GND: 1827.91,100.39 1827.91,203.9 1834.65,210.63 1921.26,210.63 1921.26,135.83 1885.83,100.39
  region net VCCA_B: 1798.39,248.03 1798.39,216.54 1811.02,203.9 1811.02,100.39 1750,100.39 1750,213.43 1772.8,236.22 1772.8,248.03
  region net GND: 1675.2,224.41 1675.2,301.18 1620.08,301.18 1620.08,224.41
  region net +5V: 1769.69,267.72 1736.22,301.18 1681.1,301.18 1681.1,224.41 1734.25,224.41 1769.69,259.84
  region net VCCA_A: 1798.39,279.53 1798.39,322.83 1811.02,335.47 1811.02,429.13 1750,429.13 1750,314.13 1774.76,289.37 1774.76,279.53
  region net GND: 1835.79,279.53 1835.79,326.77 1829.88,332.68 1829.88,413.39 1893.7,413.39 1893.7,316.93 1881.89,305.12 1875.16,305.12 1855.47,285.43 1855.47,279.53
  region net VCCDIG18_1: 588.58,910.43 588.58,929.13 665.35,1005.91 740.16,1005.91 748.03,998.03 925.2,998.03 925.2,1076.77 793.31,1076.77 718.5,1151.57 649.61,1151.57 649.61,1027.56 577.76,955.71 577.76,910.43
  region net VCCDIG33: 561.02,826.77 561.02,807.09 486.22,732.28 413.39,732.28 407.48,738.19 224.41,738.19 224.41,659.45 372.05,659.45 444.88,586.61 501.97,586.61 501.97,710.63 572.83,781.5 572.83,826.77
  region net NetL201_1: 596.46,895.67 633.86,895.67 647.64,881.89 730.31,881.89 750,862.2 787.4,862.2 787.4,937.01 750,937.01 726.38,913.39 643.7,913.39 633.86,903.54 596.46,903.54
  region net +5V: 724.41,998.03 667.32,998.03 596.46,927.17 596.46,911.42 627.95,911.42 637.8,921.26 724.41,921.26
  region net GND: 537.4,848.43 521.65,848.43 507.87,862.2 425.2,862.2 425.2,938.98 496.06,938.98 496.06,895.67 519.68,872.05 537.4,872.05
  region net GND: 510.83,586.61 510.83,709.65 559.06,757.87 582.68,757.87 582.68,586.61
  region net GND: 612.99,887.8 628.74,887.8 642.52,874.02 724.41,874.02 724.41,803.15 653.54,803.15 653.54,841.34 630.71,864.17 612.99,864.17
  region net GND: 631.89,1151.57 631.89,1019.69 578.74,966.54 566.93,966.54 561.02,972.44 561.02,1151.57
  region net NetL200_2: 553.15,832.68 521.65,832.68 509.84,820.87 421.26,820.87 399.61,799.21 366.14,799.21 366.14,874.02 399.61,874.02 417.32,856.3 505.91,856.3 521.65,840.55 553.15,840.55
  region net +5V: 425.2,740.16 484.25,740.16 553.15,809.06 553.15,824.8 521.65,824.8 511.81,814.96 425.2,814.96
  region net GND: 1677.17,967.52 1606.3,967.52 1606.3,1053.15 1677.17,1053.15
  region net VCC_FEM_1: 1925.2,1041.34 2009.84,1041.34 2021.65,1029.53 2021.65,948.82 1962.6,948.82 1962.6,982.28 1954.72,990.16 1925.2,990.16
  region net NetC207_1: 1795.28,988.19 1691.93,988.19 1691.93,1091.54 1755.91,1091.54 1755.91,1015.75 1763.78,1007.87 1795.28,1007.87
  region net GND: 1895.59,1066.93 2002.05,1066.93 2002.05,1122.05 1895.59,1122.05
  region net GND: 708.66,667.32 708.66,383.86 992.13,383.86 992.13,667.32
  region net GND: 324.8,383.86 324.8,183.07 525.59,183.07 525.59,383.86
  region net GND: 2139.76,732.28 2139.76,622.05 2250,622.05 2250,732.28
  region net +5V: 1789.37,1120.57 1789.37,1064.47 1845.47,1064.47 1845.47,1120.57
  pour cut-out: 1676.18,1122.05 1797.24,1122.05 1797.24,1126.97 1676.18,1126.97
  region net GND: 1138.7,129.84 1138.7,116.77 1131.89,116.77 1131.89,129.84

## Silkscreen, mask and mechanical layers (free items; w line width, h text height)
Top Overlay:
  text "SX1308PxxxGW" at 1139.76,1120.08 h39.37
  text "SX1308 Picocell Gateway" at 1642.72,64.96 h39.37
Bottom Overlay:
  text "PCB_E381V02C 4517" at 1574.8,257.87 h43.31 r270
  text "SX1308 Picocell Gateway" at 2097.44,151.57 h41.34 r270
Top Solder:
  region: 2874.02,1220.47 2826.77,1220.47 2826.77,818.9 2874.02,818.9
  region: 2874.02,0 2874.02,401.57 2826.77,401.57 2826.77,0
  region: 9.84,1220.47 9.84,1181.1 2864.17,1181.1 2864.17,1220.47
  region: 9.84,39.37 9.84,0 2864.17,0 2864.17,39.37
Bottom Solder:
  region: 2874.02,1220.47 2874.02,818.9 2826.77,818.9 2826.77,1220.47
  region: 2826.77,0 2874.02,0 2874.02,401.57 2826.77,401.57
  region: 9.84,1220.47 9.84,1181.1 2864.17,1181.1 2864.17,1220.47
  region: 9.84,39.37 9.84,0 2864.17,0 2864.17,39.37
  region: 2246.06,727.36 2246.06,626.97 2143.7,626.97 2143.7,727.36
  region: 717.52,658.46 983.27,658.46 983.27,392.72 717.52,392.72
Mechanical 3:
  text "Origin(0;0)" at -403.54,-62.01 h39.37
Mechanical 14:
  the board outline again, w3.94
Mechanical 15:
  lines w1.97: 2478.35,157.48 2561.02,157.48 ; 2519.69,116.14 2519.69,198.82
  lines w3.94: 19.69,610.24 2933.07,610.24

## Dimensions
0,0 to 0,1220.47 on Mechanical 3
0,0 to 2480.31,157.48 on Mechanical 3
0,0 to 2480.31,157.48 on Mechanical 3
0,0 to 2874.02,0 on Mechanical 3

## Text inside footprints (layer, text, board x,y; h text height)
MCU_H: Top Overlay "1" at 531.5,911.42 h27.56
SPI_H: Top Overlay "1" at 568.9,1076.77 h27.56
U601: Top Overlay "1" at 564.96,108.27 h19.68
USB_DC_IN: Top Overlay "1" at 208.66,502.95 h23.62; Mechanical 15 "PCB edge" at 15.75,692.91 h23.62 r270
Y100: Top Overlay "1" at 1003.94,935.04 h23.62
Y800: Top Overlay "1" at 1401.57,1072.83 h19.68